# Altium PCB ZYZB010.PcbDoc
Units mm, origin at the board's own origin, x right, y up, seen from the top; angles counter-clockwise.
Board outline 22.02 x 16.79 mm, 4 copper layers (TopLayer, MidLayer1, MidLayer2, BottomLayer); 23 components, 30 nets, 124 pads, 113 vias.
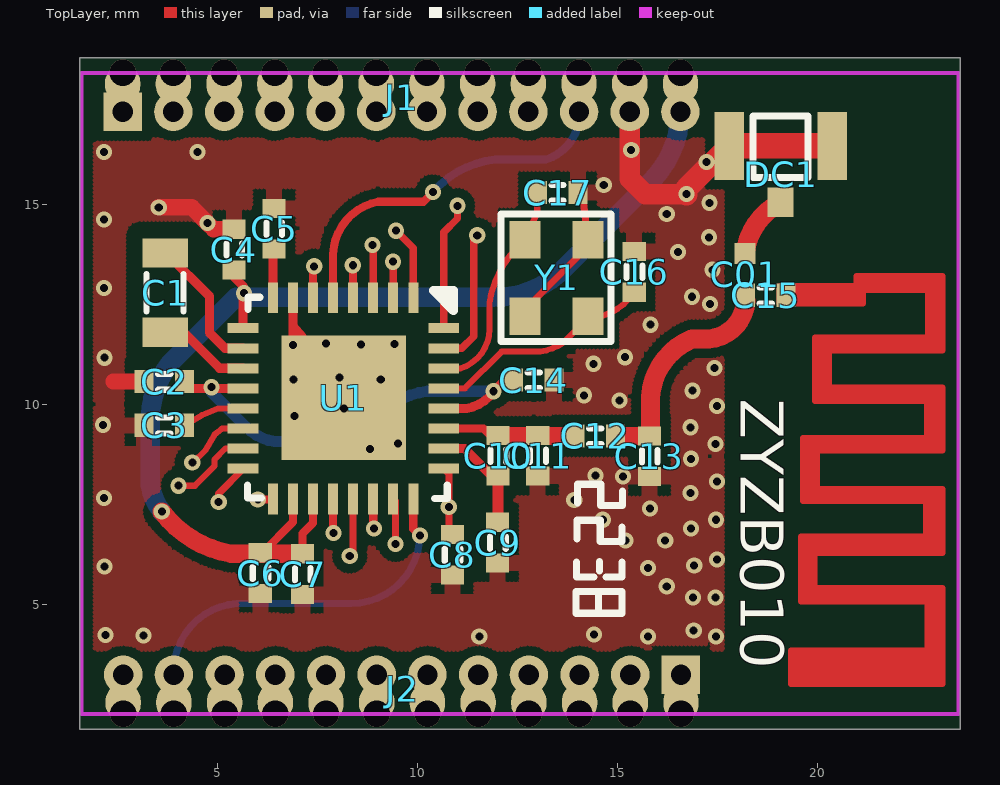
[diagram p0: TopLayer view]
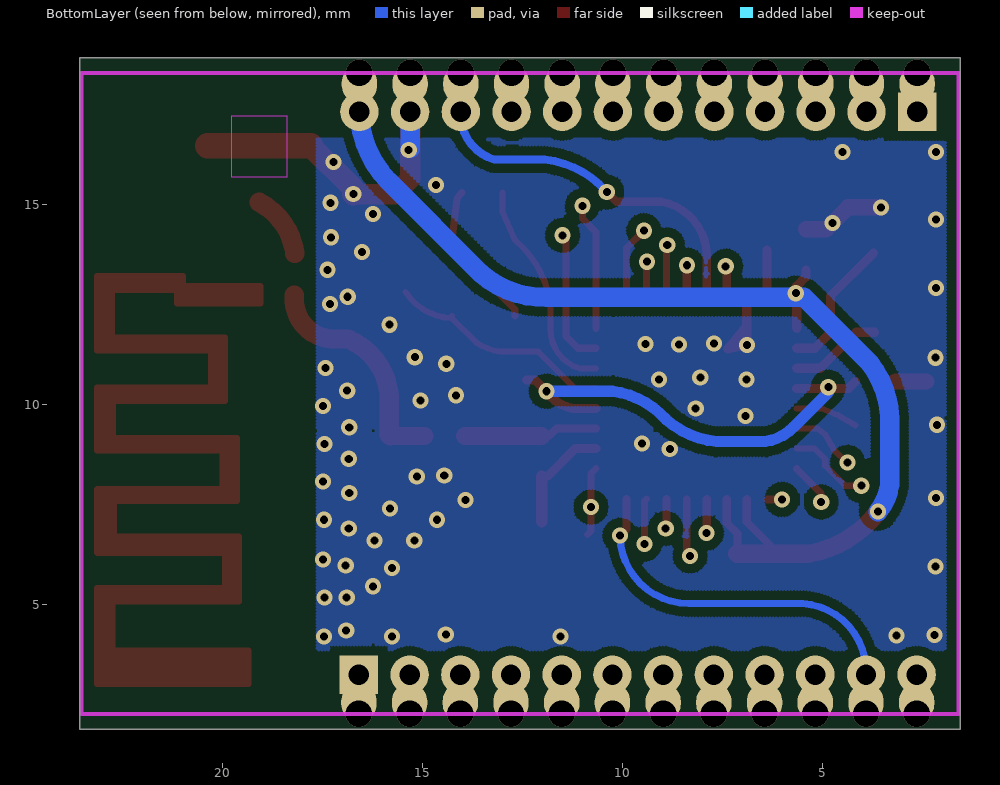
[diagram p1: BottomLayer view, seen from below]
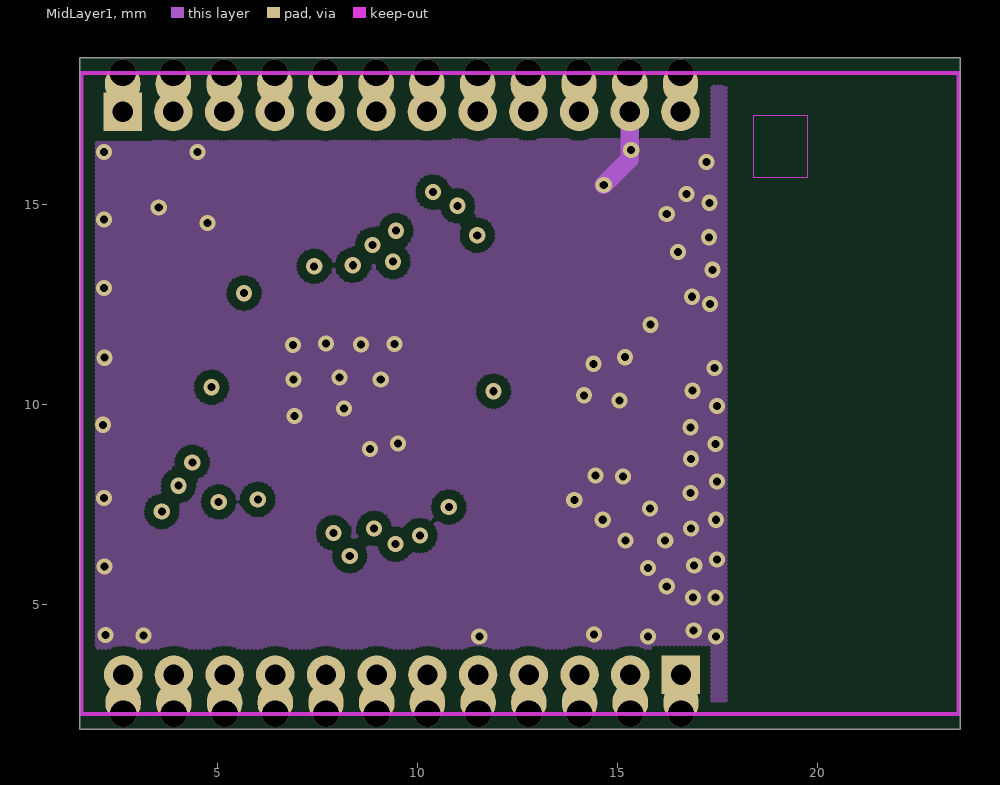
[diagram p2: MidLayer1]
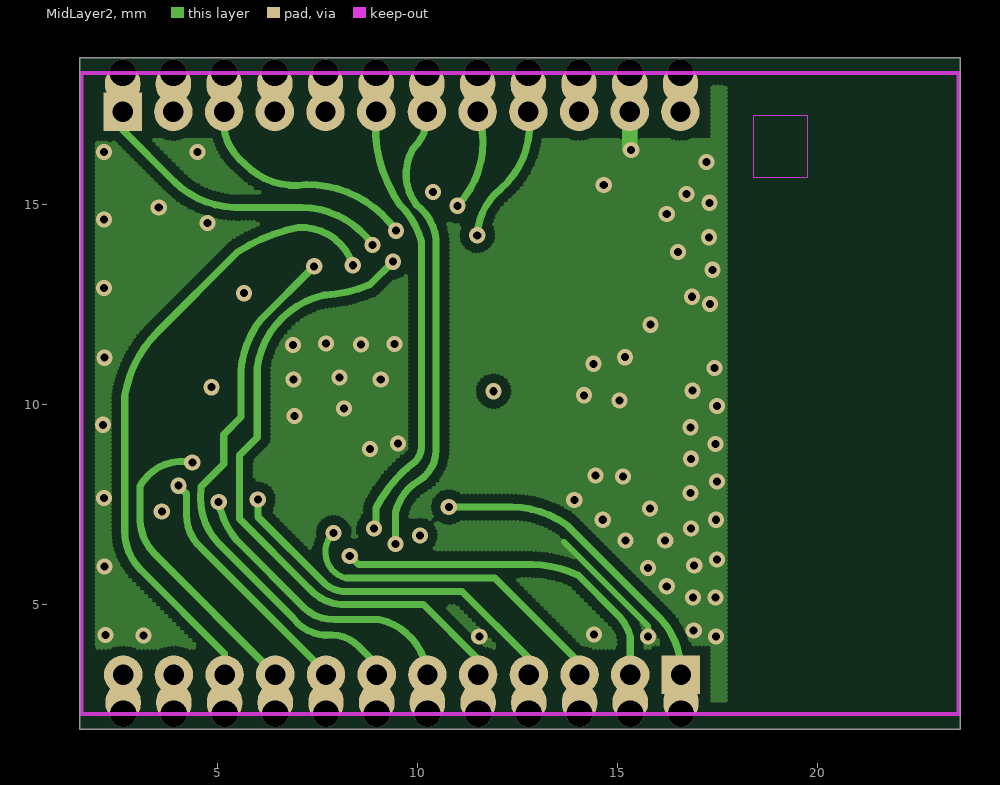
[diagram p3: MidLayer2]

## Layer stack, top to bottom
TopSolder: solder mask 0.0102, Solder Resist, Dk 3.5
TopLayer: signal copper 0.0356
Dielectric1: dielectric 0.32, FR-4, Dk 4.8
MidLayer1: signal copper 0.0356
Dielectric2: dielectric 0.32, FR-4, Dk 4.8
MidLayer2: signal copper 0.0356
Dielectric3: dielectric 0.32, FR-4, Dk 4.8
BottomLayer: signal copper 0.0356
BottomSolder: solder mask 0.0102, Solder Resist, Dk 3.5

## Board outline
1.563,1.893 23.583,1.893 23.583,18.681 1.563,18.681

## Design rules (kind name [scope] priority, off if disabled: settings)
AssemblyTestPointUsage [All] p0: scope1count=1 scope1_0_kind=Board scope1_0_value=Board scope2count=1 scope2_0_kind=Board scope2_0_value=Board commentlength=0
AssemblyTestpoint [All] p0: scope1count=1 scope1_0_kind=Board scope1_0_value=Board scope2count=1 scope2_0_kind=Board scope2_0_value=Board commentlength=0
Clearance [All] p0: scope1count=1 scope1_0_kind=Board scope1_0_value=Board scope2count=1 scope2_0_kind=Board scope2_0_value=Board commentlength=0 gap=0.102
Clearance [All] p1: gap=0.102 ignorepadtopadclearanceinfootprint=FALSE except(0: Arc-Hole Track-Hole SMDPad-Hole THPad-Hole Via-Hole Fill-Hole Poly-Hole Region-Hole Text-Hole)
ComponentClearance [All] p0 off: scope1count=1 scope1_0_kind=Board scope1_0_value=Board scope2count=1 scope2_0_kind=Board scope2_0_value=Board commentlength=0 gap=0.254 collisioncheckmode=3
ComponentClearance [All] p1 off: gap=0.254 collisioncheckmode=3 verticalgap=0.254 showdistances=FALSE
DiffPairsRouting [All] p0: scope1count=1 scope1_0_kind=Board scope1_0_value=Board scope2count=1 scope2_0_kind=Board scope2_0_value=Board commentlength=0
FabricationTestPointUsage TestPointUsage [All] p0: scope1count=1 scope1_0_kind=Board scope1_0_value=Board scope2count=1 scope2_0_kind=Board scope2_0_value=Board commentlength=0 valid=0 allowmultiple=FALSE
FabricationTestPointUsage TestPointUsage [All] p1: valid=0 allowmultiple=FALSE
FabricationTestpoint Testpoint [All] p0: scope1count=1 scope1_0_kind=Board scope1_0_value=Board scope2count=1 scope2_0_kind=Board scope2_0_value=Board commentlength=0 side=3 testpointundercomponent=TRUE minsize=1.016 maxsize=2.54 preferedsize=1.524 minholesize=0.508 maxholesize=1.016 preferedholesize=0.813 testpointgrid=0.025
FabricationTestpoint Testpoint [All] p1: side=3 testpointundercomponent=TRUE minsize=1.016 maxsize=2.54 preferedsize=1.524 minholesize=0.508 maxholesize=1.016 preferedholesize=0.813 testpointgrid=0.025 allowsidetop=TRUE allowsidebottom=TRUE usegrid=TRUE gridtolerance=0
FanoutControl Fanout_BGA [All] p0 off: scope1count=1 scope1_0_kind=Board scope1_0_value=Board scope2count=1 scope2_0_kind=Board scope2_0_value=Board commentlength=69 // Protel DXP Scope 1 Expression Was: IsBGA   Fanout_BGA (Default Rule)
FanoutControl Fanout_LCC [All] p0 off: scope1count=1 scope1_0_kind=Board scope1_0_value=Board scope2count=1 scope2_0_kind=Board scope2_0_value=Board commentlength=69 // Protel DXP Scope 1 Expression Was: IsLCC   Fanout_LCC (Default Rule)
FanoutControl Fanout_SOIC [All] p0 off: scope1count=1 scope1_0_kind=Board scope1_0_value=Board scope2count=1 scope2_0_kind=Board scope2_0_value=Board commentlength=71 // Protel DXP Scope 1 Expression Was: IsSOIC   Fanout_SOIC (Default Rule)
FanoutControl Fanout_Small [All] p0 off: scope1count=1 scope1_0_kind=Board scope1_0_value=Board scope2count=1 scope2_0_kind=Board scope2_0_value=Board commentlength=84 // Protel DXP Scope 1 Expression Was: (CompPinCount < 5)   Fanout_Small (Default Rule)
FanoutControl Fanout_Default [All] p0: scope1count=1 scope1_0_kind=Board scope1_0_value=Board scope2count=1 scope2_0_kind=Board scope2_0_value=Board commentlength=30 // Fanout_Default (Default Rule)
Height [All] p0: scope1count=1 scope1_0_kind=Board scope1_0_value=Board scope2count=1 scope2_0_kind=Board scope2_0_value=Board commentlength=0
HoleSize [All] p0 off: scope1count=1 scope1_0_kind=Board scope1_0_value=Board scope2count=1 scope2_0_kind=Board scope2_0_value=Board commentlength=0 absolutevalues=TRUE maxlimit=2.54 minlimit=0.025 maxpercent=80.000 minpercent=20.000
HoleSize [All] p1 off: absolutevalues=TRUE maxlimit=2.54 minlimit=0.025 maxpercent=80.000 minpercent=20.000
HoleToHoleClearance [All] p0: scope1count=1 scope1_0_kind=Board scope1_0_value=Board scope2count=1 scope2_0_kind=Board scope2_0_value=Board commentlength=0
LayerPairs [All] p0: scope1count=1 scope1_0_kind=Board scope1_0_value=Board scope2count=1 scope2_0_kind=Board scope2_0_value=Board commentlength=0 enforce=TRUE
MinimumSolderMaskSliver [All] p0 off: scope1count=1 scope1_0_kind=Board scope1_0_value=Board scope2count=1 scope2_0_kind=Board scope2_0_value=Board commentlength=0
MinimumSolderMaskSliver [All] p1 off: minsoldermaskwidth=0.254
NetAntennae [All] p0: scope1count=1 scope1_0_kind=Board scope1_0_value=Board scope2count=1 scope2_0_kind=Board scope2_0_value=Board commentlength=0
PasteMaskExpansion [All] p0: scope1count=1 scope1_0_kind=Board scope1_0_value=Board scope2count=1 scope2_0_kind=Board scope2_0_value=Board commentlength=0 expansion=0
PlaneClearance [All] p0: scope1count=1 scope1_0_kind=Board scope1_0_value=Board scope2count=1 scope2_0_kind=Board scope2_0_value=Board commentlength=0 clearance=0.508
PlaneConnect [All] p0: scope1count=1 scope1_0_kind=Board scope1_0_value=Board scope2count=1 scope2_0_kind=Board scope2_0_value=Board commentlength=0 planeconnectstyle=Relief reliefexpansion=0.508 reliefentries=4 reliefconductorwidth=0.254 reliefairgap=0.254
PolygonConnect [All] p0: scope1count=1 scope1_0_kind=Board scope1_0_value=Board scope2count=1 scope2_0_kind=Board scope2_0_value=Board commentlength=0 connectstyle=Relief reliefconductorwidth=0.4 reliefentries=4 polygonreliefangle="90 Angle"
PolygonConnect [All] p1: connectstyle=Relief reliefconductorwidth=0.4 reliefentries=4 polygonreliefangle="90 Angle" airgapwidth=0.254
RoutingCorners [All] p0: scope1count=1 scope1_0_kind=Board scope1_0_value=Board scope2count=1 scope2_0_kind=Board scope2_0_value=Board commentlength=0 cornerstyle=45-Degree minsetback=2.54 maxsetback=2.54
RoutingLayers [All] p0: scope1count=1 scope1_0_kind=Board scope1_0_value=Board scope2count=1 scope2_0_kind=Board scope2_0_value=Board commentlength=0 top layer=Horizontal mid layer 1="Not Used" mid layer 2="Not Used" bottom layer=Vertical
RoutingLayers [All] p1: top layer_v5=TRUE mid layer 1_v5=FALSE mid layer 2_v5=FALSE bottom layer_v5=TRUE
RoutingPriority [All] p0: scope1count=1 scope1_0_kind=Board scope1_0_value=Board scope2count=1 scope2_0_kind=Board scope2_0_value=Board commentlength=0
RoutingTopology [All] p0: scope1count=1 scope1_0_kind=Board scope1_0_value=Board scope2count=1 scope2_0_kind=Board scope2_0_value=Board commentlength=0 topology=Shortest
RoutingVias [All] p0: scope1count=1 scope1_0_kind=Board scope1_0_value=Board scope2count=1 scope2_0_kind=Board scope2_0_value=Board commentlength=0 holewidth=0.711 width=1.27 viastyle="Through Hole" minholewidth=0.3 minwidth=0.3 maxholewidth=0.711 maxwidth=1.27
RoutingVias [All] p1: holewidth=0.711 width=1.27 viastyle="Through Hole" minholewidth=0.3 minwidth=0.3 maxholewidth=0.711 maxwidth=1.27
ShortCircuit [All] p0: scope1count=1 scope1_0_kind=Board scope1_0_value=Board scope2count=1 scope2_0_kind=Board scope2_0_value=Board commentlength=0 allowed=FALSE
SilkToBoardRegionClearance [All] p0: scope1count=1 scope1_0_kind=Board scope1_0_value=Board scope2count=1 scope2_0_kind=Board scope2_0_value=Board commentlength=0
SilkToSilkClearance [All] p0 off: scope1count=1 scope1_0_kind=Board scope1_0_value=Board scope2count=1 scope2_0_kind=Board scope2_0_value=Board commentlength=0
SilkToSilkClearance [All] p1 off: silktosilkclearance=0.254
SilkToSolderMaskClearance [All] p0 off: scope1count=1 scope1_0_kind=Board scope1_0_value=Board scope2count=1 scope2_0_kind=Board scope2_0_value=Board commentlength=44 // Protel DXP Scope 1 Expression Was: IsPad
SilkToSolderMaskClearance [IsPad] p1 off: minsilkscreentomaskgap=0.254 clearancetoexposedcopper=TRUE
SolderMaskExpansion [All] p0: scope1count=1 scope1_0_kind=Board scope1_0_value=Board scope2count=1 scope2_0_kind=Board scope2_0_value=Board commentlength=0 expansion=0.051
SolderMaskExpansion [All] p1: expansion=0.051 istentingtop=FALSE
UnRoutedNet [All] p0: scope1count=1 scope1_0_kind=Board scope1_0_value=Board scope2count=1 scope2_0_kind=Board scope2_0_value=Board commentlength=0
UnpouredPolygon [All] p0: scope1count=1 scope1_0_kind=Board scope1_0_value=Board scope2count=1 scope2_0_kind=Board scope2_0_value=Board commentlength=0
Width [All] p0: scope1count=1 scope1_0_kind=Board scope1_0_value=Board scope2count=1 scope2_0_kind=Board scope2_0_value=Board commentlength=0 maxlimit=5 minlimit=0.1 preferedwidth=0.254
Width [All] p1: maxlimit=5 minlimit=0.1 preferedwidth=0.254
22 further rules are at their usual default settings.

## Components (designator, comment, footprint, x,y, rotation, side; value= is the part's Value field where it differs from the comment)
C01 "Comment" 01 18.212,12.738 r0 top
C1 "22uH" COMPONENT_3 3.708,13.792 r0 top
C2 "1uF" COMPONENT_2#1 4.191,10.579 r0 top
C3 "1uF" COMPONENT_2#1 4.191,9.487 r0 top
C4 "100nF" COMPONENT_2#2 5.423,14.389 r90 top
C5 "1uF" COMPONENT_2#2 6.426,14.91 r90 top
C6 "1.5uF" COMPONENT_2#1 6.083,6.299 r90 top
C7 "100nF" COMPONENT_2#1 7.137,6.274 r90 top
C8 "100nF" COMPONENT_2#1 10.884,6.756 r90 top
C9 "20pF" COMPONENT_2#1 12.014,7.061 r90 top
C10 "39nH" COMPONENT_2#2 12.027,9.233 r90 top
C11 "2pF" COMPONENT_2#1 13.018,9.233 r90 top
C12 "39nH" COMPONENT_2#2 14.961,9.22 r0 top
C13 "2pF" COMPONENT_2#1 15.811,9.22 r90 top
C14 "1.5uF" COMPONENT_2#2 13.424,10.617 r0 top
C15 "20pF" COMPONENT_2#2 19.228,12.738 r0 top
C16 "NC" COMPONENT_2#2 15.43,13.83 r90 top
C17 "NC" COMPONENT_2#2 14.021,15.303 r0 top
DC1 "NC" COMPONENT_5 19.088,15.062 r0 top
J1 "NC" COMPONENT_6 2.642,17.323 r0 top
J2 "NC" COMPONENT_6 16.599,3.251 r180 top
U1 "TLSR8258F1KET32" COMPONENT_1 9.906,12.675 r0 top
Y1 "24MHz" COMPONENT_4 12.7,14.122 r0 top

## Footprints (in the part's own frame and the unit in brackets; to place one, negate y for a bottom-side part, rotate by r counter-clockwise, add the part's x,y. Pads: shape width x height; smd on the part's side, far side on the other; paste and mask are expansions set on the pad)
01 [mil]
  rect 18.84x22.84 smd: 1(0,0)
  rect 20.84x20.84 smd: 2(-0.5,41)
COMPONENT_1 [mm]
  rect 0.25x0.771 smd: 1(0,0) 2(-0.501,0) 3(-1.001,0) 4(-1.502,0) 5(-2.003,0) 6(-2.504,0) 7(-3.004,0) 8(-3.505,0) 17(-3.505,-5.029) 18(-3.004,-5.029) 19(-2.504,-5.029) 20(-2.003,-5.029) 21(-1.502,-5.029) 22(-1.001,-5.029) 23(-0.501,-5.029) 24(0,-5.029)
  rect 3.12x3.12 smd: 7(-1.74,-2.502)
  rect 0.771x0.25 smd: 9(-4.255,-0.762) 10(-4.255,-1.263) 11(-4.255,-1.763) 12(-4.255,-2.264) 13(-4.255,-2.765) 14(-4.255,-3.266) 15(-4.255,-3.766) 16(-4.255,-4.267) 25(0.762,-4.267) 26(0.762,-3.766) 27(0.762,-3.266) 28(0.762,-2.765) 29(0.762,-2.264) 30(0.762,-1.763) 31(0.762,-1.263) 32(0.762,-0.762)
  silkscreen extent -4.14,-5.02 1,0.18
COMPONENT_2#1 [mil]
  rect 18.84x22.84 smd: 1(0,0) 2(-40,0)
  silkscreen extent -26,-8 -14,8
COMPONENT_2#2 [mil]
  rect 18.84x22.84 smd: 1(-40,0) 2(0,0)
  silkscreen extent -26,-8 -14,7
COMPONENT_3 [mil]
  rect 44.84x28.84 smd: 1(0,0) 2(0,-78)
  silkscreen extent -18,-58 18,-20
COMPONENT_4 [mil]
  rect 30.84x36.84 smd: 1(0,0) 2(0,-75) 3(62,-75) 4(62,0)
  silkscreen extent -24,-100 84,26
COMPONENT_5 [mil]
  rect 25.84x28.84 smd: 1(0,0)
  rect 28.84x66.84 smd: 2(51,55.5) 3(-50.5,55.5)
  silkscreen extent -27,24 27,85
COMPONENT_6 [mil]
  rect 37.84x37.84 hole 20: 1(0,0)
  oval 34.84x37.84 all layers, no hole: 1(0,27.5) 2(49.91,27.5) 3(99.82,27.5) 4(149.73,27.5) 5(199.64,27.5) 6(249.54,27.5) 7(299.46,27.5) 8(349.36,27.5) 9(399.27,27.5) 10(449.18,27.5) 11(499.09,27.5) 12(549,27.5)
  round 37.84 hole 20: 2(49.91,0) 3(99.82,0) 4(149.73,0) 5(199.64,0) 6(249.54,0) 7(299.46,0) 8(349.36,0) 9(399.27,0) 10(449.18,0) 11(499.09,0) 12(549,0)

## Part data
C1 C10 C12: library part INDUCTOR
C2 C3 C4 C5 C6 C7 C8 C9 C11 C13 C14 C15 C16 C17: library part CAP, "Capacitor"
DC1: library part SPT-3
J1 J2: library part CON12, "Connector"
Y1: library part CRYSTAL4-2

## Via types
v1: diameter 0.404, hole 0.201, TopLayer to BottomLayer, tented both sides, 89 vias
v2: diameter 0.658, hole 0.658, TopLayer to BottomLayer, tented both sides, 24 vias

## Nets (pads, with @x,y where several pads share a name; then routed paths per layer and width w, separated by ;. In a path a pad name is that pad's centre, name@x,y a point inside that pad or via, vN(x,y) a via of type N, cw(c..) or ccw(c..) an arc to the next point about the centre after c; other vN are vias at no path point)
GND: C2.2 C3.2 C4.2 C5.2 C6.2 C7.2 C8.2 C9.2 C11.2 C13.2 C14.2 C16.2 C17.2 DC1.2 DC1.3 J1.11 U1.7 Y1.2 Y1.4 | length 26.1
  TopLayer w0.178: Y1.2 12.7,12.383 14.275,13.957 Y1.4 14.148,15.151 C17.2
  TopLayer w0.229: U1.7@6.902,12.675 6.902,11.963 ; v1(6.896,11.493) U1.7@7.154,11.662 ; v1(6.896,11.493) 6.902,11.499 6.902,11.963 ; v1(6.896,11.493) 7.379,11.392 U1.7@7.154,11.662 ; 6.902,11.963 7.13,11.689 U1.7@7.154,11.662
  TopLayer w0.406: 2.413,10.579 C2.2 ; v1(3.543,14.935) 4.369,14.935 v1(4.763,14.541) 4.915,14.389 C4.2
  TopLayer w0.508: J1.11@15.319,18.021 15.319,17.323 15.319,15.649 15.702,15.265 v1(16.739,15.265)
  TopLayer w0.559: v1(16.739,15.265) 16.739,15.405 DC1.3
  TopLayer w0.635: DC1.3 DC1.2
  MidLayer1 w0.457: v1(14.668,15.494) 15.319,16.144 15.319,16.612 15.319,17.323 J1.11@15.319,18.021
  MidLayer2 w0.152: 13.678,6.566 15.773,4.47 v1(15.773,4.204)
  MidLayer2 w0.381: v1@15.319,16.406 J1.11@15.319,17.323
  BottomLayer w0.483: v1@15.319,16.406 15.319,17.323 J1.11@15.319,18.021
  other v1: 11.557,4.204 17.475,4.204 2.21,4.242 3.162,4.229 14.427,4.255 16.916,4.356 16.904,5.182 17.462,5.182 16.243,5.461 15.773,5.918 2.184,5.956 16.929,5.982 17.501,6.134 15.215,6.604 16.205,6.604 16.853,6.909 14.643,7.125 17.475,7.125 15.824,7.404 13.932,7.62 2.172,7.671 16.84,7.798 17.501,8.077 15.151,8.204 14.465,8.23 16.853,8.649 8.826,8.89 9.525,9.03 17.462,9.017 16.84,9.436 2.146,9.5 6.934,9.716 8.179,9.906 17.501,9.97 15.062,10.109 14.173,10.236 16.891,10.351 6.909,10.63 9.093,10.63 8.064,10.681 17.437,10.922 14.414,11.024 2.184,11.176 15.202,11.189 8.598,11.506 9.436,11.519 7.722,11.532 15.837,12.002 17.323,12.522 16.878,12.7 2.172,12.916 17.386,13.373 16.523,13.818 17.297,14.186 2.172,14.63 16.243,14.77 17.31,15.05 17.234,16.066 2.172,16.319 4.508,16.319 15.354,16.37
  other v2: 15.319,18.301
NetC1_1: C1.1 U1.10 | length 3.4
  TopLayer w0.229: C1.1@3.734,13.792 4.813,12.713 4.813,11.798 5.2,11.412 U1.10
NetC1_2: C1.2 U1.11 | length 2.3
  TopLayer w0.229: C1.2 4.166,11.811 5.065,10.911 U1.11
NetC2_1: C2.1 C14.1 U1.12 U1.28 | length 11.5
  TopLayer w0.229: C2.1 4.36,10.41 U1.12 ; U1.28 11.243,9.91 ccw(c11.087,10.891) v1(11.913,10.338) 12.192,10.617 C14.1
  BottomLayer w0.279: v1(4.864,10.439) 4.864,10.312 5.74,9.436 ccw(c6.608,10.277) 6.439,9.08 7.658,9.08 ccw(c7.447,11.286) 8.915,9.627 cw(c10.529,8.202) 10.262,10.338 v1(11.913,10.338)
NetC3_1: C3.1 U1.13 | length 1.6
  TopLayer w0.152: C3.1 4.623,9.741 5.038,9.91 U1.13
NetC5_1: C5.1 U1.8 | length 1.2
  TopLayer w0.229: U1.8 C5.1@6.401,13.868
NetC8_1: C8.1 J2.1 U1.25 | length 9.6
  TopLayer w0.178: U1.25 10.795,8.28 v1(10.795,7.442) 10.795,6.845 C8.1
  MidLayer2 w0.178: v1(10.795,7.442) 12.37,7.442 cw(c12.347,5.033) 13.741,6.998 16.066,4.673 cw(c14.664,3.337) J2.1@16.599,3.251
  other v2: 16.599,2.273
NetC9_1: C9.1 C10.1 U1.26 | length 2.8
  TopLayer w0.229: U1.26 11.183,8.908 11.874,8.217 C10.1
  TopLayer w0.279: C9.1@12.027,7.074 C10.1
NetC10_2: C10.2 C11.1 C12.1 U1.27 | length 3.3
  TopLayer w0.203: U1.27 11.66,9.409 11.836,9.233 C10.2
  TopLayer w0.457: C10.2@12.04,9.22 C12.1
NetC12_2: C01.1 C12.2 C13.1 C15.1 | length 5.7
  TopLayer w0.457: C12.2 C13.1
  TopLayer w0.483: C13.1 15.837,9.246 15.837,10.185 cw(c17.52,10.087) 16.878,11.646 17.297,11.646 ccw(c17.22,12.64) C01.1
NetC16_1: C16.1 U1.29 Y1.3 | length 5.7
  TopLayer w0.152: U1.29 11.198,10.41 12.116,11.328 13.081,11.328 ccw(c12.859,12.757) 13.665,11.557 Y1.3@14.275,12.167 ; Y1.3 Y1.3@14.275,12.167 ; C16.1 cw(c14.228,13.605) Y1.3@14.275,12.167
NetC17_1: C17.1 U1.30 Y1.1 | length 5.5
  TopLayer w0.152: U1.30 11.089,10.911 ccw(c10.786,11.89) 11.811,11.887 11.811,12.548 cw(c14.366,12.144) Y1.1 13.005,14.808 C17.1
NetJ1_1: J1.1 U1.3 | length 9
  TopLayer w0.178: v1(8.89,13.995) 8.905,13.981 U1.3
  MidLayer2 w0.178: J1.1@2.642,17.323 2.642,16.866 3.924,15.583 ccw(c5.516,17.198) 5.664,14.935 7.125,14.935 cw(c7.089,12.74) v1(8.89,13.995)
  other v2: 2.642,18.301
NetJ1_3: J1.3 U1.1 | length 7.6
  TopLayer w0.178: v1(9.474,14.351) 9.906,13.919 U1.1
  MidLayer2 w0.178: J1.3@5.177,17.323 ccw(c6.512,17.102) 5.69,16.027 ccw(c6.953,17.22) 7.239,15.507 cw(c7.262,12.812) v1(9.474,14.351)
  other v2: 5.177,18.301
NetJ1_6: J1.6 U1.22 | length 11.8
  TopLayer w0.203: v1@8.905,6.932 U1.22
  MidLayer2 w0.178: v1@8.979,6.96 8.979,7.43 cw(c11.931,5.911) 9.881,8.522 ccw(c9.588,8.954) 10.109,8.928 10.109,14.072 ccw(c8.186,13.582) 9.563,15.011 cw(c12.399,16.956) J1.6@8.98,17.323
  other v1: 8.928,6.909
  other v2: 8.98,18.301
NetJ1_7: J1.7 U1.23 | length 12.7
  TopLayer w0.178: U1.23 9.461,7.589 v1(9.461,6.515)
  MidLayer2 w0.178: v1(9.461,6.515) 9.461,7.315 cw(c10.702,7.002) 10.071,8.115 ccw(c9.563,8.876) 10.477,8.865 10.477,14.135 ccw(c9.257,14.009) 9.982,14.999 cw(c11.009,15.765) 9.893,16.396 ccw(c9.114,17.225) J1.7@10.248,17.323
  other v2: 10.248,18.301
NetJ1_8: J1.8 U1.32 | length 5.7
  TopLayer w0.178: U1.32 10.668,14.313 11.011,14.656 v1(11.011,14.973)
  MidLayer2 w0.178: v1(11.011,14.973) ccw(c9.349,16.559) J1.8@11.515,17.323
  other v2: 11.515,18.301
NetJ1_9: J1.9 U1.31 | length 6.9
  TopLayer w0.178: U1.31 11.12,11.412 11.417,11.709 11.417,14.148 v1(11.506,14.237)
  MidLayer2 w0.178: v1(11.506,14.237) cw(c13.09,14.164) 12.103,15.405 ccw(c10.72,16.975) J1.9@12.783,17.323
  other v2: 12.783,18.301
NetJ1_10: J1.10 U1.5 | length 9.1
  TopLayer w0.203: U1.5 7.903,13.771 cw(c9.28,13.72) 9.03,15.075 10.16,15.075 v1(10.401,15.316)
  BottomLayer w0.203: v1(10.401,15.316) cw(c12.196,13.775) 11.963,16.129 13.208,16.129 ccw(c12.887,17.25) J1.10@14.051,17.323
  other v2: 14.051,18.301
NetJ2_2: J2.2 U1.21 | length 10.3
  TopLayer w0.178: v1(8.319,6.223) 8.404,6.308 U1.21
  MidLayer2 w0.178: v1(8.319,6.223) 8.534,6.007 12.878,6.007 cw(c12.816,3.158) 14.021,5.74 15.075,4.686 cw(c14.223,3.926) 15.331,4.201 J2.2@15.331,3.251
  other v2: 15.331,2.273
NetJ2_3: J2.3 U1.20 | length 9.3
  TopLayer w0.203: v1@7.903,6.804 U1.20
  MidLayer2 w0.152: v1(7.912,6.794) ccw(c8.378,6.316) 8.23,5.664
  MidLayer2 w0.178: 8.23,5.664 11.951,5.664 14.064,3.551 J2.3@14.064,3.251
  other v2: 14.064,2.273
NetJ2_4: J2.4 U1.17 | length 9.4
  TopLayer w0.203: v1(6.02,7.633) U1.17@6.388,7.633
  MidLayer2 w0.178: v1(6.02,7.633) 6.02,7.201 7.696,5.524 ccw(c8.211,6.115) 8.268,5.334 11.125,5.334 12.796,3.663 J2.4@12.796,3.251
  other v2: 12.796,2.273
NetJ2_5: J2.5 U1.2 | length 17.2
  TopLayer w0.178: U1.2 v1@9.405,13.569
  MidLayer2 w0.178: v1(9.398,13.576) 8.826,13.005 cw(c7.474,16.236) 7.658,12.738 ccw(c8.153,10.626) 6.007,10.947 6.007,9.182 5.563,8.738 5.563,7.15 7.302,5.41 ccw(c8.197,6.182) 8.28,5.004 10.16,5.004 11.528,3.636 J2.5@11.528,3.251
  other v2: 11.528,2.273
NetJ2_6: J2.6 U1.16 | length 8.5
  TopLayer w0.178: v1(5.042,7.569) 5.042,7.785 5.651,8.395 U1.16
  MidLayer2 w0.178: v1(5.042,7.569) ccw(c7.09,7.945) 5.486,6.617 7.201,4.902 ccw(c7.889,5.654) 7.925,4.635 9.042,4.635 cw(c8.717,3.121) J2.6@10.26,3.251
  other v2: 10.26,2.273
NetJ2_7: J2.7 U1.6 | length 14.3
  TopLayer w0.203: U1.6 7.402,13.435 v1(7.429,13.462)
  MidLayer2 w0.178: v1(7.429,13.462) 6.083,12.116 ccw(c7.991,10.662) 5.601,10.859 5.601,9.69 5.169,9.258 5.169,8.522 4.597,7.95 4.597,7.899 ccw(c6.255,7.679) 5.055,6.515 6.909,4.661 ccw(c7.762,5.305) 7.874,4.242 cw(c7.87,3.312) 8.547,3.95 8.993,3.504 J2.7@8.993,3.251
  other v2: 8.993,2.273
NetJ2_8: J2.8 U1.15 | length 8.3
  TopLayer w0.152: v1(4.039,7.976) 4.445,7.976 4.94,8.471 4.94,8.636 5.212,8.908 U1.15
  MidLayer2 w0.178: v1(4.039,7.976) 4.242,7.772 4.242,7.239 ccw(c5.318,7.226) 4.597,6.426 J2.8@7.725,3.299
  other v2: 7.725,2.273
NetJ2_9: J2.9 U1.14 | length 9.3
  TopLayer w0.152: v1(4.381,8.56) 4.407,8.56 4.712,8.865 4.94,9.258 5.118,9.398 5.129,9.409 U1.14
  MidLayer2 w0.178: v1(4.381,8.56) ccw(c4.129,7.381) 3.073,7.963 3.073,7.087 ccw(c4.385,7.183) 3.429,6.28 J2.9@6.457,3.251
  other v2: 6.457,2.273
NetJ2_10: J2.10 U1.4 | length 16.8
  TopLayer w0.203: U1.4 v1@8.404,13.478
  MidLayer2 w0.178: J2.10@5.19,3.251 5.19,3.777 3.099,5.867 cw(c4.047,6.835) 2.692,6.858 2.692,10.223 cw(c5.618,9.727) 3.505,11.811 5.512,13.818 cw(c7.837,10.231) 7.023,14.427 cw(c7.124,13.104) v1(8.395,13.487)
  other v2: 5.19,2.273
NetJ2_11: J2.11 U1.24 | length 9.1
  TopLayer w0.203: U1.24 9.906,6.896 v1(10.071,6.731)
  BottomLayer w0.178: J2.11@3.922,3.251 cw(c5.617,3.336) 5.499,5.029 8.357,5.029 ccw(c8.342,6.758) v1(10.071,6.731)
  other v2: 3.922,2.273
VCC: C4.1 C6.1 C7.1 J1.12 U1.9 U1.18 U1.19 | length 28.2
  TopLayer w0.203: C6.1 6.134,6.299 6.902,7.067 U1.18 ; C7.1 7.137,6.782 7.402,7.047 U1.19
  TopLayer w0.229: C4.1 5.423,13.195 5.651,12.967 U1.9
  TopLayer w0.457: v1(3.619,7.328) ccw(c5.826,9.007) 5.359,6.274 C7.1
  BottomLayer w0.483: v1(3.619,7.328) cw(c4.747,8.217) 3.327,8.001 3.327,9.665 cw(c5.683,9.585) 3.835,11.049 5.474,12.687 11.9,12.687 ccw(c11.967,15.083) 13.551,13.284 15.875,15.608 ccw(c14.022,17.382) J1.12@16.586,17.323
  other v1: 5.677,12.789
  other v2: 16.586,18.301
pads on no net: C01.2 C15.2 DC1.1 J1.2 J1.4 J1.5 J2.12
copper on no net: | length 74.1
  TopLayer w0.152: 19.063,12.535 19.063,12.967 20.993,12.967 20.993,13.221 23.139,13.221 23.139,11.354 20.295,11.354 20.295,10.427 23.139,10.427 23.139,8.852 20.002,8.852 20.002,7.887 23.139,7.887 23.139,6.299 19.939,6.299 19.939,5.423 23.139,5.423 23.139,3.023 19.355,3.023 19.355,3.861 22.758,3.861 22.758,5.08 19.596,5.08 19.596,6.706 22.72,6.706 22.72,7.595 19.647,7.595 19.647,9.169 22.746,9.169 22.746,10.096 19.952,10.096 19.952,11.684 22.771,11.684 22.771,12.865 21.145,12.865 21.145,12.535 19.063,12.535
  TopLayer w0.483: 18.199,13.779 cw(c19.875,13.567) 19.088,15.062
  other v2: 2.654,2.273 3.909,18.301 6.445,18.301 7.712,18.301

## Polygon pours and split planes (outlines as drawn)
GND on TopLayer "TopLayer-NewNet1" (hatched 90Degree grid 0.1 track 0.11, remove dead copper, pour order 2): 1.918,16.637 1.918,3.873 17.64,3.873 17.64,16.637
GND on MidLayer1 "MidLayer1-NewNet1" (hatched 90Degree grid 0.1 track 0.11, remove dead copper, pour order 4): 1.994,16.612 1.994,3.924 17.374,3.924 17.374,2.489 17.716,2.489 17.716,18.047 17.374,18.047 17.374,16.612
GND on MidLayer2 "MidLayer2-NewNet1" (hatched 90Degree grid 0.1 track 0.11, remove dead copper, pour order 6): 1.994,16.612 1.994,3.924 17.374,3.924 17.374,2.489 17.716,2.489 17.716,18.047 17.374,18.047 17.374,16.612
GND on BottomLayer "BottomLayer-NewNet1" (hatched 90Degree grid 0.08 track 0.09, remove dead copper, pour order 8): 1.918,16.637 1.918,3.873 17.64,3.873 17.64,16.637

## Keep-outs
KeepOutLayer:
  rectangle: 18.402,15.684 19.774,17.221
  lines w0.1: 1.613,2.273 23.533,2.273 23.533,18.288 1.613,18.288 1.613,2.273

## Other copper
TopLayer:
  rectangle: 19.063,12.535 21.145,12.967
  rectangle: 20.993,12.865 23.139,13.221
  rectangle: 22.796,11.354 23.139,12.967
  rectangle: 19.952,11.354 23.139,11.684
  rectangle: 19.952,10.096 20.32,11.684
  rectangle: 20.256,10.096 23.139,10.427
  rectangle: 22.796,8.852 23.139,10.427
  rectangle: 19.647,8.852 22.847,9.169
  rectangle: 19.647,7.595 20.002,9.169
  rectangle: 19.926,7.595 23.139,7.887
  rectangle: 22.847,6.299 23.139,7.887
  rectangle: 22.72,6.299 23.139,7.595
  rectangle: 22.682,6.299 23.139,7.887
  rectangle: 19.596,6.299 23.139,6.706
  rectangle: 19.596,5.08 19.964,6.706
  rectangle: 19.914,5.08 23.139,5.423
  rectangle: 22.771,3.023 23.139,5.423
  rectangle: 19.355,3.023 23.139,3.861

## Silkscreen, mask and mechanical layers (free items; w line width, h text height)
TopOverlay:
  lines w0.178: 13.983,6.071 13.983,5.69 14.427,5.69 ; 13.995,6.642 13.995,7.112 14.58,7.112 14.58,6.579 15.126,6.579 15.126,6.947 ; 14.008,7.544 14.008,8.014 14.592,8.014 14.592,7.48 15.138,7.48 15.138,7.849 ; 14.541,4.788 14.541,5.334 ; 14.567,5.842 14.567,6.083 ; 14.732,5.69 15.126,5.69 15.126,6.071 ; 13.97,4.788 13.97,5.194 13.97,5.334 15.126,5.334 15.126,4.788 13.97,4.788
  text "ZYZB010" at 18.098,10.147 h1.08 r270
TopSolder:
  lines w0.432: 16.802,10.287 16.802,4.229 2.172,4.229 2.172,16.307 16.802,16.307 16.802,12.713